# Altium PCB 175-00035 rev2, Flex Pwr Sply.PcbDoc
Units mil, origin at the board's own origin, x right, y up, seen from the top; angles counter-clockwise.
Board outline 6377.95 x 3937.01 mil, 5 copper layers (Top Layer (*GTL), Internal Plane 1 (*GP1), Internal Plane 2 (*GP2), Internal Plane 3 (*.GP3), Bottom Layer (*GBL)); 77 components, 29 nets, 339 pads, 48 vias.
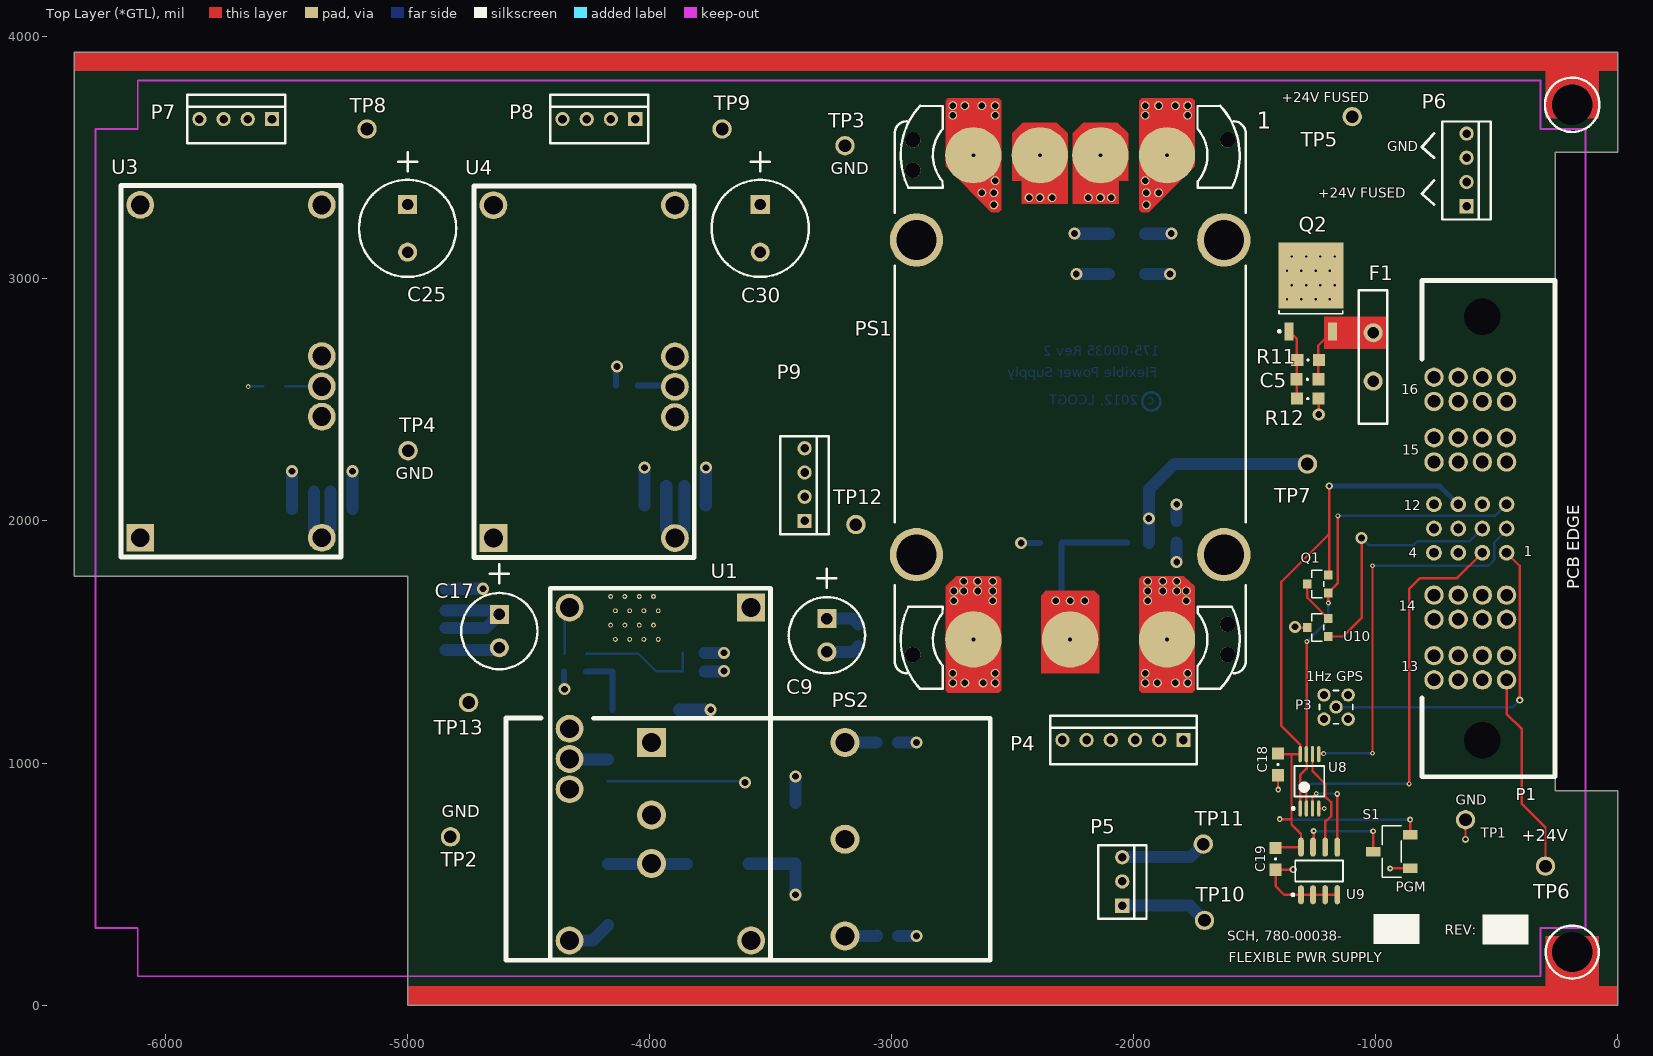
[diagram p0: Top Layer (*GTL) view]
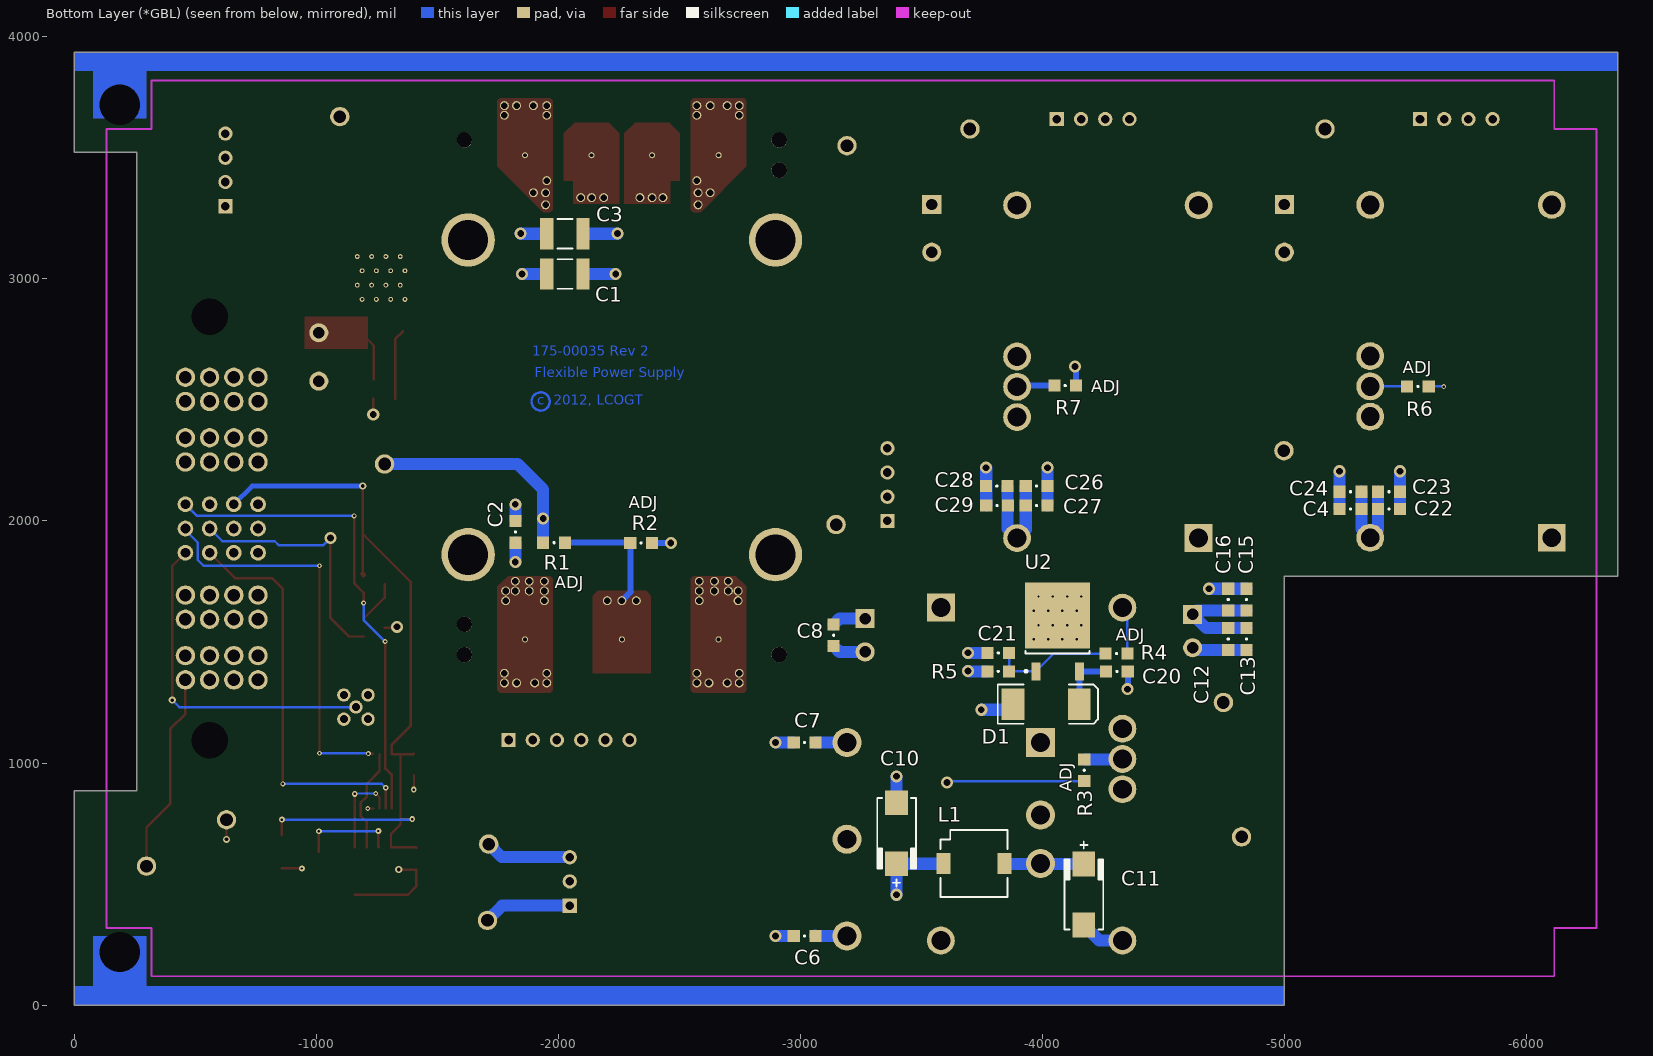
[diagram p1: Bottom Layer (*GBL) view, seen from below]
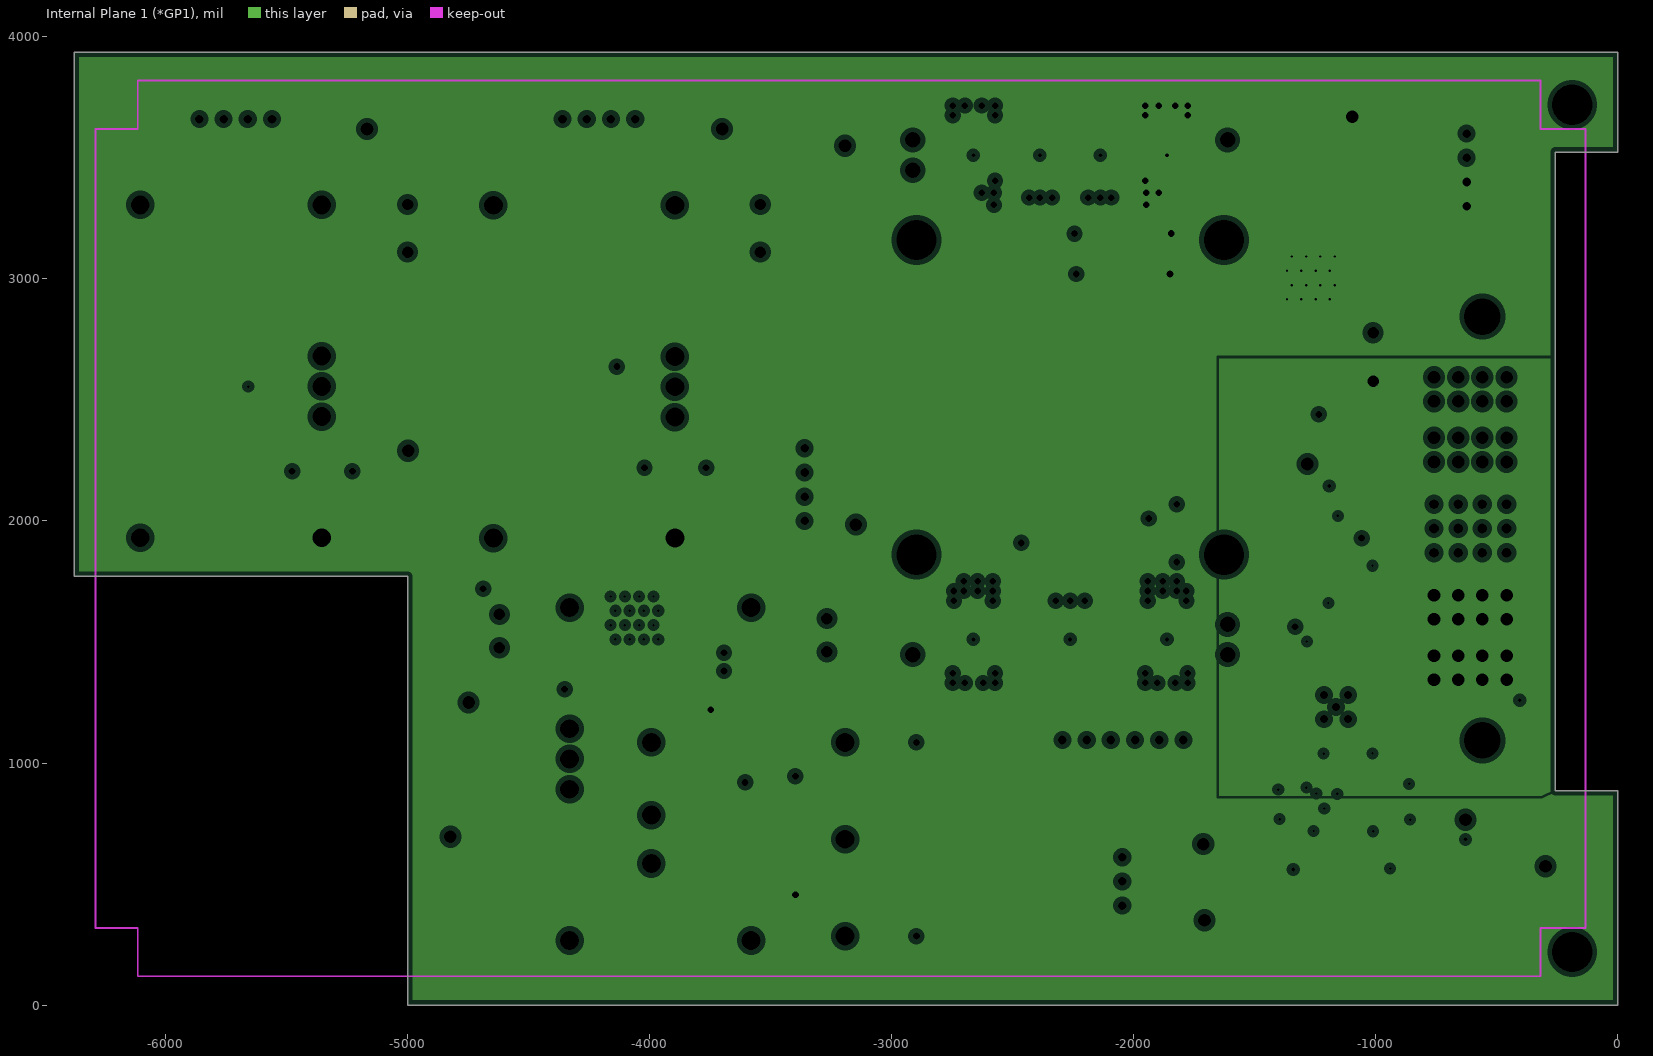
[diagram p2: Internal Plane 1 (*GP1), clearances drawn from the general rule]
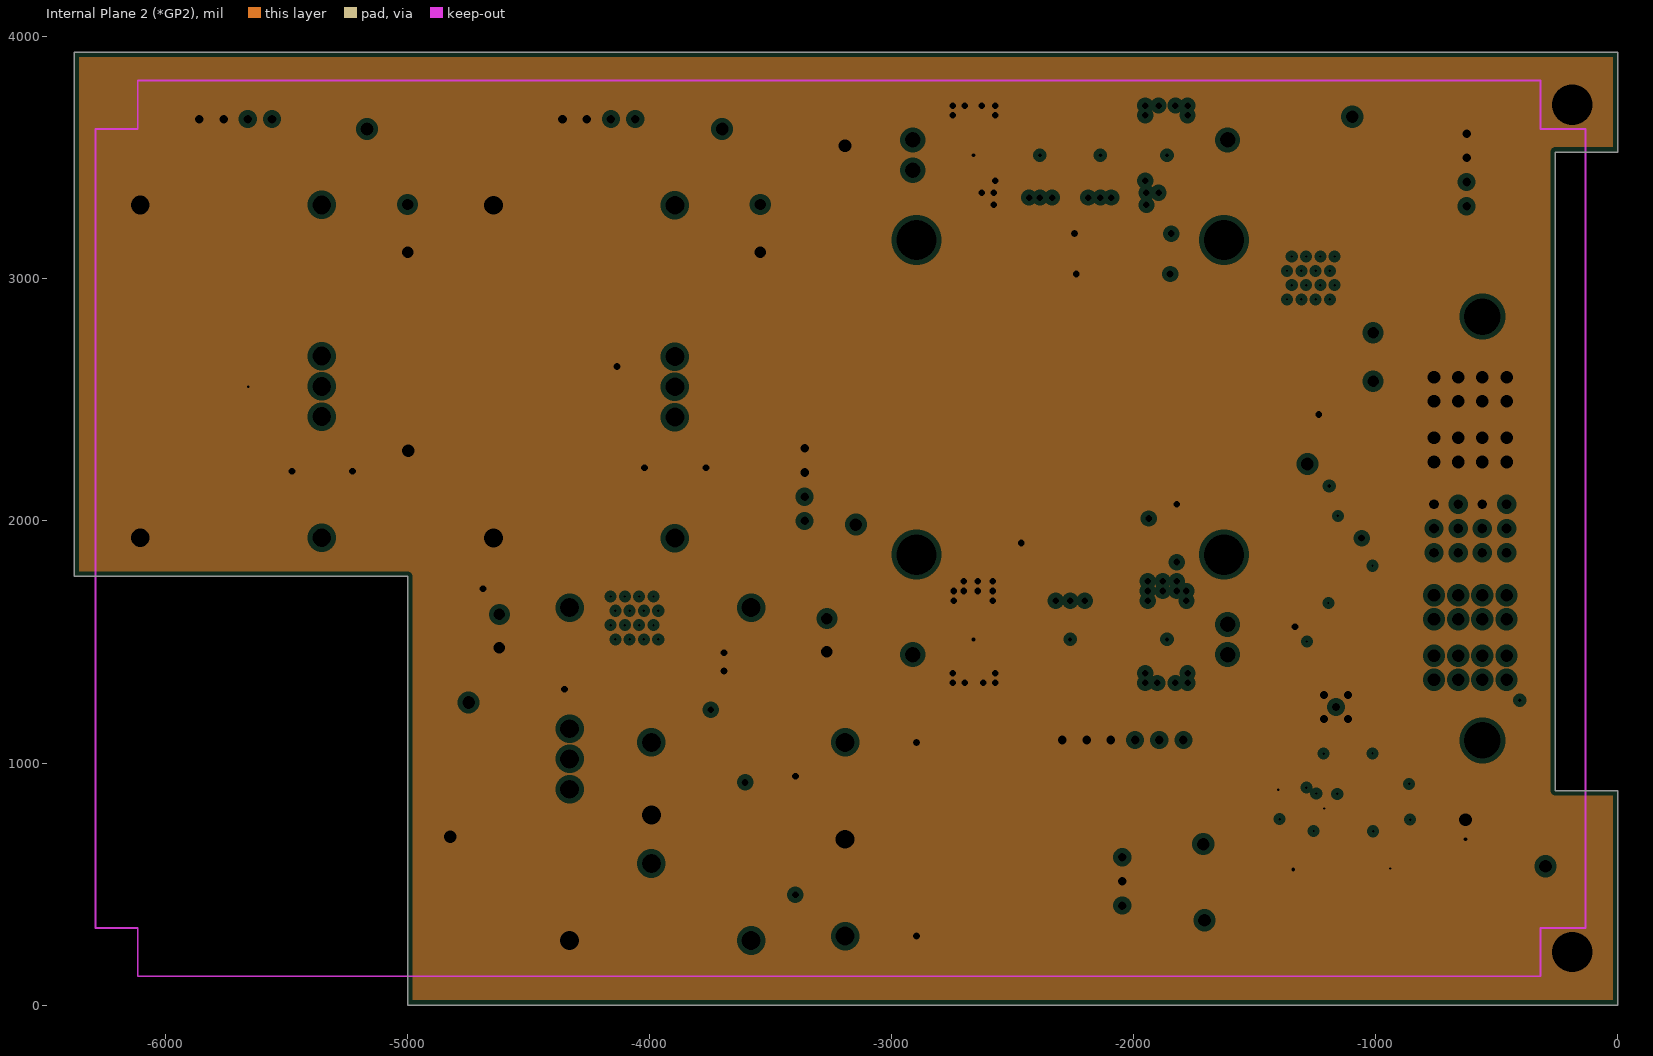
[diagram p3: Internal Plane 2 (*GP2), clearances drawn from the general rule]
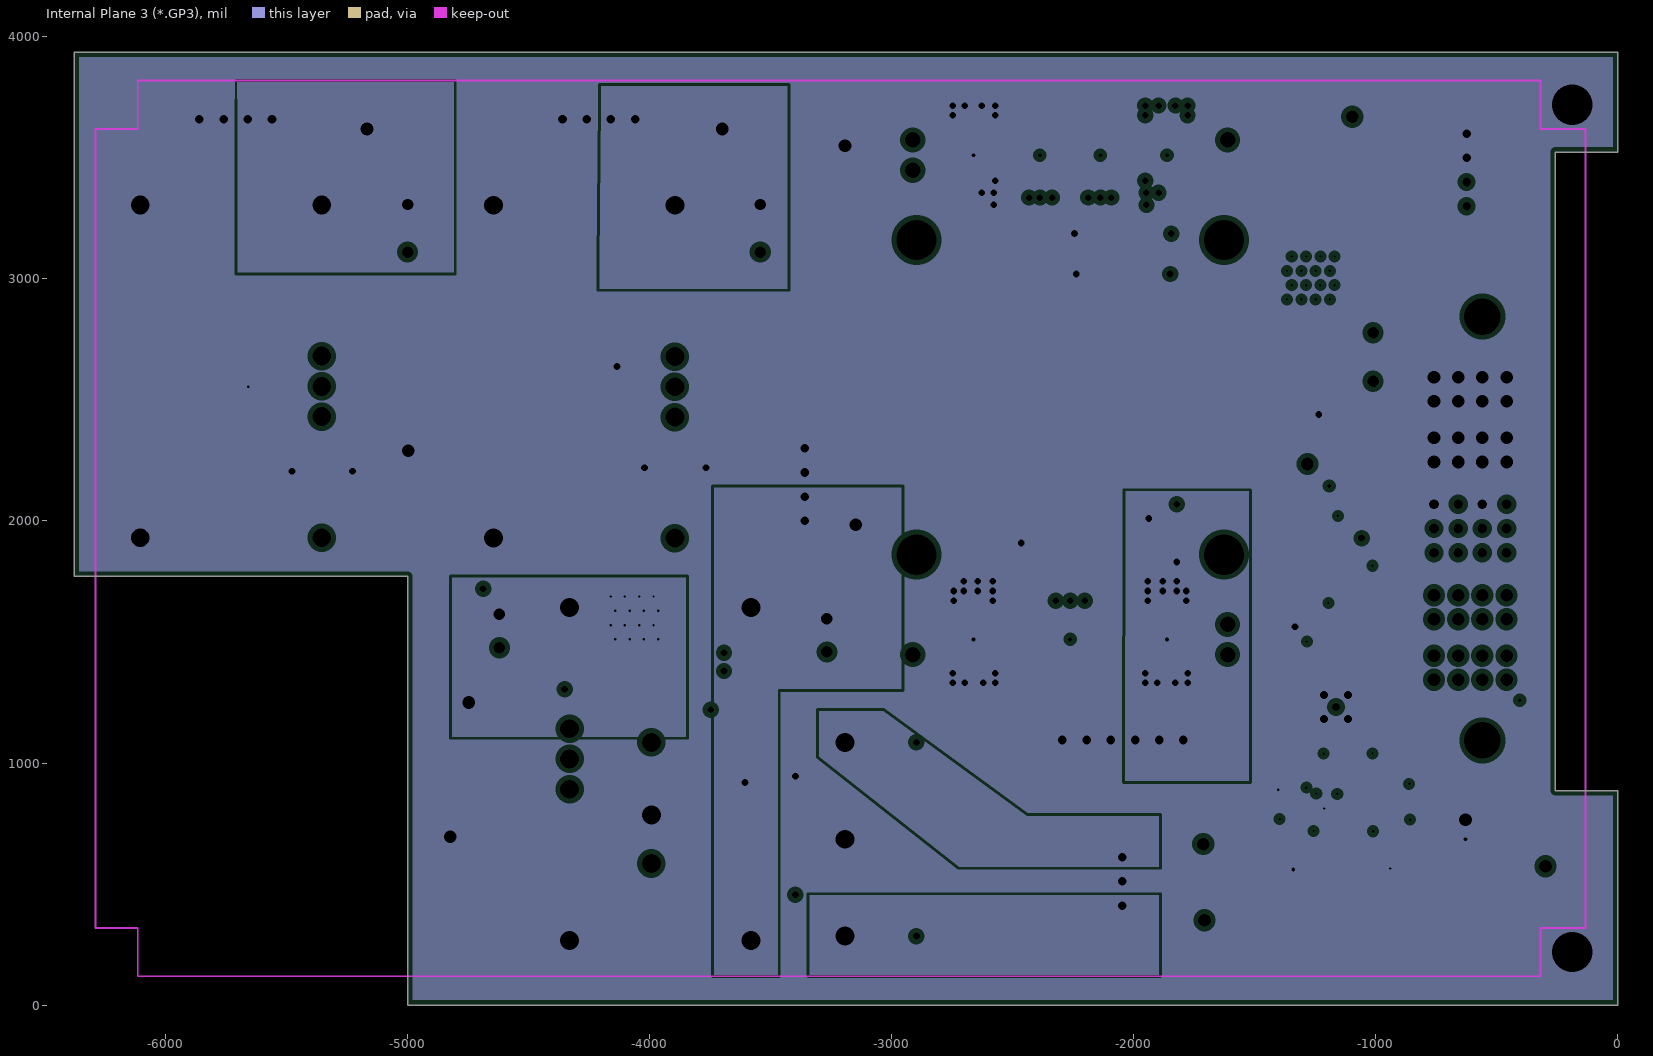
[diagram p4: Internal Plane 3 (*.GP3), clearances drawn from the general rule]

## Layer stack, top to bottom
Top Layer (*GTL): signal copper 1.4
Dielectric: core 12.6, FR-4, Dk 4.8
Internal Plane 1 (*GP1): plane copper 1.4, net (Multiple Nets)
Dielectric: prepreg 12.6, FR-4, Dk 4.8
Internal Plane 2 (*GP2): plane copper 1.4, net GND
Dielectric: core 12.6, FR-4, Dk 4.8
Internal Plane 3 (*.GP3): plane copper 1.4, net (Multiple Nets)
Dielectric: prepreg 12.6, FR-4, Dk 4.8
Bottom Layer (*GBL): signal copper 1.4

## Board outline
-5000,0 -5000,1771.65 -6377.95,1771.65 -6377.95,3937.01 0,3937.01 0,3523.62 -259.84,3523.62 -259.84,885.83 0,885.83 0,0

## Design rules (kind name [scope] priority, off if disabled: settings)
Clearance [All] p1: gap=9
ComponentClearance ComponentClearance_1 [InComponent('PS2') vs InComponent('U1')] p1: gap=-3937.01 collisioncheckmode=3 verticalgap=-3937.01 showdistances=FALSE
ComponentClearance [All] p2: gap=10 collisioncheckmode=3 verticalgap=10 showdistances=FALSE
HoleSize [All] p1: absolutevalues=TRUE maxlimit=200 minlimit=1 maxpercent=80.000 minpercent=20.000
HoleToHoleClearance [All] p1: gap=5 allowstackedmicrovias=TRUE
MinimumSolderMaskSliver [All] p1: minsoldermaskwidth=1
PlaneClearance [All] p1: clearance=20
PlaneConnect PlaneConnect_1 [InComponent('PS1')] p1: planeconnectstyle=Direct reliefexpansion=20 reliefentries=4 reliefconductorwidth=10 reliefairgap=10
PlaneConnect [All] p2: planeconnectstyle=Relief reliefexpansion=20 reliefentries=4 reliefconductorwidth=10 reliefairgap=10
PolygonConnect [All] p1: connectstyle=Relief reliefconductorwidth=10 reliefentries=4 polygonreliefangle="90 Angle"
RoomDefinition "780-00038 rev2, Pg1, SCH, Flex Pwr Sply" [InComponentClass('780-00038 rev2, Pg1, SCH, Flex Pwr Sply')] p1: confinementstyle=ConfineIn formatcopy=TRUE lockcomponents=FALSE outline -7755.91,-1515.34 1173.05,-1515.34 1173.05,5051 -7755.91,5051
RoutingVias [All] p1: holewidth=28 width=50 viastyle="Through Hole" minholewidth=10 minwidth=20 maxholewidth=28 maxwidth=50
SilkToSilkClearance [All] p1: silktosilkclearance=2
SilkscreenOverComponentPads [All] p1: minsilkscreentomaskgap=2
SolderMaskExpansion [All] p1: expansion=4
Width [All] p1: maxlimit=50 minlimit=10 preferedwidth=25
20 further rules are at their usual default settings.

## Components (designator, comment, footprint, x,y, rotation, side; value= is the part's Value field where it differs from the comment)
C1 "Y-RATED" 1812 -2027.64,3020 r0 bottom
C2 "100V" SMD_0805 -1822.95,1955 r90 bottom
C3 "0.22uF" 1812 -2027.64,3186.18 r0 bottom
C4 "35V CER" SMD_0805 -5272.95,2050 r180 bottom
C5 "Cap SMD" SMD_0805 -1282.95,2585 r0 top
C6 "Cap SMD" SMD_0805 -3017.95,285 r180 bottom
C7 "Cap SMD" SMD_0805 -3017.95,1085 r0 bottom
C8 "35V CER" SMD_0805 -3137.95,1527.67 r90 bottom
C9 "35V" "CAP, Thru Hole 8mm dia" -3267.72,1527.67 r90 top
C10 "35V" SMD_CAP_7343 -3397.95,710 r270 bottom
C11 "35V" SMD_CAP_7343 -4171.54,456.5 r90 bottom
C12 "35V CER" SMD_0805 -4767.95,1512.5 r90 bottom
C13 "35V CER" SMD_0805 -4842.95,1512.09 r90 bottom
C15 "35V CER" SMD_0805 -4842.95,1675 r270 bottom
C16 "35V CER" SMD_0805 -4767.95,1675 r270 bottom
C17 "35V" "CAP, Thru Hole 8mm dia" -4620.67,1545 r90 top
C18 "Cap SMD" SMD_0805 -1404.61,994.22 r270 top
C19 "Cap SMD" SMD_0805 -1414.61,604.22 r270 top
C20 "Cap SMD" SMD_0805 -4307.95,1378.74 r0 bottom
C21 "Cap SMD" SMD_0805 -3817.95,1455 r180 bottom
C22 "35V CER" SMD_0805 -5431.91,2050 r0 bottom
C23 "35V CER" SMD_0805 -5431.91,2120.5 r0 bottom
C24 "35V CER" SMD_0805 -5272.95,2120.5 r180 bottom
C25 "35V" "CAP, Thru Hole 10mm dia" -5000,3208.66 r90 top
C26 "35V CER" SMD_0805 -3976.38,2144 r0 bottom
C27 "35V CER" SMD_0805 -3976.38,2063 r0 bottom
C28 "35V CER" SMD_0805 -3811.85,2144 r180 bottom
C29 "35V CER" SMD_0805 -3813.27,2063 r180 bottom
C30 "35V" "CAP, Thru Hole 10mm dia" -3543.31,3208.66 r90 top
D1 "S5BC-13-F" SMC -4015.75,1243 r180 bottom
Designator60 "Comment" "TARGET MECHANICAL 5" 255.91,4409.45 r180 bottom
Designator61 "Comment" "TARGET MECHANICAL 5" -6889.76,-1496.06 r180 bottom
Designator62 "Comment" "TARGET MECHANICAL 5" -6732.28,4330.71 r180 bottom
F1 "RUEF400" "PolySwitch Radial 0.2" -1011.38,2677.17 r90 top
L1 "445-3869-1-ND" "Inductor TDC SLF" -3717.95,585 r90 bottom
P1 "PETC-02-12-02--01-S-RA-SD" PETC-02-12-02-01-RA -610.24,1968.5 r0 top locked
P3 "COAX MMCX" MMCX2.54-V5 -1164.57,1231.1 r90 top
P4 "Header 6" "HDR1X6 for IDC" -1795,1095 r180 top
P5 "Header 3" "HDR1X3 for IDC" -2047.72,410.92 r90 top
P6 "Header 4" "HDR1X4 for IDC" -625.53,3300 r90 top
P7 "Header 4" "HDR1X4 for IDC" -5560,3660 r180 top
P8 "Header 4" "HDR1X4 for IDC" -4060,3660 r180 top
P9 "Header 4" "HDR1X4 for IDC" -3360,2000 r90 top
PS1 "Vicor Micro" "VICOR MICRO SURFMATE" -1612.95,1447.57 r0 top locked
PS2 "BetaDyne LMB15" "BetaDyne LNB15, DC/DC" -2592.95,1185 r180 top
Q1 "FDV304P" SMD_SOT23_3 -1240.16,1739.57 r90 top
Q2 "IRF5303P" "TO-252(D-PAK)  POWERPAD" -1268.74,2954.37 r90 top
R1 "Res 0805" SMD_0805 -1982.95,1910 r0 bottom
R2 "Res 0805" SMD_0805 -2342.95,1909 r180 bottom
R3 "Res 0805" SMD_0805 -4172.95,970 r270 bottom
R4 "Res 0805" SMD_0805 -4306.54,1451.57 r180 bottom
R5 "Res 0805" SMD_0805 -3817.95,1378.74 r180 bottom
R6 "Res 0805" SMD_0805 -5551.18,2555.61 r0 bottom
R7 "Res 0805" SMD_0805 -4094.49,2559.06 r0 bottom
R11 "Res 0805" SMD_0805 -1280,2665 r0 top
R12 "Res 0805" SMD_0805 -1281.54,2505 r180 top
S1 "CJS-1200TB" CAS-120B -934.61,634.22 r90 top
TP1 "Test point" PAD_80D_052H -629.92,765.45 r180 top
TP2 "Test point" PAD_80D_052H -4822.95,695 r90 top
TP3 "Test point" PAD_80D_052H -3192.95,3550 r90 top
TP4 "Test point" PAD_80D_052H -4997.95,2290 r90 top
TP5 "Test point" PAD_80D_052H -1097.95,3670 r90 top
TP6 "Test point" PAD_80D_052H -299.61,574.02 r90 top
TP7 "Test point" PAD_80D_052H -1282.95,2235 r90 top
TP8 "Test point" PAD_80D_052H -5167.48,3619 r90 top
TP9 "Test point" PAD_80D_052H -3700.79,3619 r90 top
TP10 "Test point" PAD_80D_052H -1707.95,350 r90 top
TP11 "Test point" PAD_80D_052H -1712.95,665 r90 top
TP12 "Test point" PAD_80D_052H -3147.95,1985 r90 top
TP13 "Test point" PAD_80D_052H -4747.95,1250 r90 top
U1 "4A Neg Adj Switching Regulator" "TEXAS INST SWITCHING REGULATOR" -4330.71,1641.73 r270 top
U2 "Voltage Reg, Adj" "TO-252(D-PAK)  POWERPAD" -4062.95,1550 r90 bottom
U3 "6A Pos Switching Regulator" "TEXAS INST SWITCHING REGULATOR" -5354.33,1930.61 r90 top
U4 "6A Pos Switching Regulator" "TEXAS INST SWITCHING REGULATOR" -3895.67,1929 r90 top
U8 "SN74CBT3306PWLE" PW008_N -1274.61,924.22 r90 top
U9 "M24C32RMN1" SOP8_N -1234.61,554.22 r90 top
U10 "DS2411" SMD_SOT23_3 -1240.16,1559.57 r90 top

## Footprints (in the part's own frame and the unit in brackets; to place one, negate y for a bottom-side part, rotate by r counter-clockwise, add the part's x,y. Pads: shape width x height; smd on the part's side, far side on the other; paste and mask are expansions set on the pad)
1812 [mm] "Chip Capacitor, Body 4.5x3.2mm, IPC High Density"
  rect 1.4x3.3 smd: 1(-1.9,0) 2(1.9,0)
  silkscreen extent -0.8,-1.55 0.8,1.55, body extent -2.4,-1.7 2.4,1.7, height 1.4
"BetaDyne LNB15, DC/DC" [mil] "15W Low Noise"
  rect 120x120 hole 78: 1(1400,100)
  round 120 hole 78: 2(1400,400) 3(1400,600) 4(600,900) 5(600,500) 6(600,100)
  silkscreen extent 0,0 2000,1000
"CAP, Thru Hole 8mm dia" [mm]
  rect 2x2 hole 1.2: 1(1.75,0)
  round 2 hole 1.2: 2(-1.75,0)
  silkscreen extent -4,-4 7,4
"CAP, Thru Hole 10mm dia" [mm]
  rect 2x2 hole 1.2: 1(2.5,0)
  round 2 hole 1.2: 2(-2.5,0)
  silkscreen extent -5.1,-5.1 8,5.1
CAS-120B [mm] "Copal Electronics CAS SMD Slide Switch"
  rect 1x1.5 smd: 1(-1.75,-1.95) 2(0,1.95) 3(1.75,-1.95)
  silkscreen extent -2.69,-1 2.69,1
"HDR1X3 for IDC" [mm] "Connector; Header; 3 Position"
  rect 1.5x1.5 hole 0.9: 1(0,0)
  round 1.5 hole 0.9: 2(2.54,0) 3(5.08,0)
  silkscreen extent -1.4,-2.54 6.35,2.54
"HDR1X4 for IDC" [mm] "Connector; Header; 4 Position"
  rect 1.5x1.5 hole 0.9: 1(0,0)
  round 1.5 hole 0.9: 2(2.54,0) 3(5.08,0) 4(7.62,0)
  silkscreen extent -1.4,-2.54 8.89,2.54
"HDR1X6 for IDC" [mm] "Connector; Header; 6 Position"
  rect 1.5x1.5 hole 0.9: 1(0,0)
  round 1.5 hole 0.9: 2(2.54,0) 3(5.08,0) 4(7.62,0) 5(10.16,0) 6(12.7,0)
  silkscreen extent -1.4,-2.54 13.97,2.54
"Inductor TDC SLF" [mm] "SLF series"
  rect 2.2x1.5 smd: 1(0,3.2) 2(0,-3.2)
  silkscreen extent -3.5,-3.5 3.5,3.5
MMCX2.54-V5 [mm] "Connector; RF Coaxial, MMCX, Thru-Hole; 5 Position; Vertical"
  round 1.4 hole 0.85: 1(0,0) 2(-1.27,-1.27) 3(1.27,-1.27) 4(1.27,1.27) 5(-1.27,1.27)
  silkscreen extent -1.75,-1.75 1.75,1.75
PAD_80D_052H [mil]
  round 80 hole 52: 1(0,0)
PETC-02-12-02-01-RA [mil] "Samtec Male Pins, PWR(4), Signal(12), Right Angle"
  round 59.06 hole 150 unplated: 0(50,-875) 0(50,875)
  round 65 hole 40: 1(150,-100) 2(50,-100) 3(-50,-100) 4(-150,-100) 5(150,0) 6(50,0) 7(-50,0) 8(-150,0) 9(150,100) 10(50,100) 11(-50,100) 12(-150,100)
  round 80 hole 52: 13(-150,-625) 13(-150,-525) 13(-50,-625) 13(-50,-525) 13(50,-625) 13(50,-525) 13(150,-625) 13(150,-525) 14(-150,-375) 14(-150,-275) 14(-50,-375) 14(-50,-275) 14(50,-375) 14(50,-275) 14(150,-375) 14(150,-275) 15(-150,275) 15(-150,375) 15(-50,275) 15(-50,375) 15(50,275) 15(50,375) 15(150,275) 15(150,375) 16(-150,525) 16(-150,625) 16(-50,525) 16(-50,625) 16(50,525) 16(50,625) 16(150,525) 16(150,625)
  silkscreen extent -200,-1025 350,1025
"PolySwitch Radial 0.2" [mm] "PolySwitch footprint"
  round 2 hole 1.2: 1(-2.54,0) 2(2.54,0)
  silkscreen extent -7,-1.5 7,1.5
PW008_N [mm] "SOP, 8-Leads, Body 3x4.4mm, Pitch 0.65mm, IPC Medium Density"
  oval 1.7x0.35 smd: 1(-2.85,0.975) 2(-2.85,0.325) 3(-2.85,-0.325) 4(-2.85,-0.975) 5(2.85,-0.975) 6(2.85,-0.325) 7(2.85,0.325) 8(2.85,0.975)
  silkscreen extent -2.97,-1.55 1.6,1.82, body extent -2.25,-1.55 2.25,1.55, height 3.1
SMC [mm] "DO-214-AB/SMC; 2 C-Bend Leads; Body 7.9 x 5.9 mm, inc. leads (LxW)"
  rect 2.4x3.3 smd: 1(-3.475,0) 2(3.475,0)
  silkscreen extent -5.07,-2.05 5.43,2.05
SMD_0805 [mil]
  rect 50x50 smd: 1(-45,0) 2(45,0)
  silkscreen extent -1,-1 1,1
SMD_CAP_7343 [mil]
  rect 102x94 smd: NEG(-126,0) POS(126,0)
  silkscreen extent -145,-80 220,80
SMD_SOT23_3 [mil]
  rect 36x36 smd: 1(-37,-43) 2(37,-43) 3(0,43)
  silkscreen extent -57,-25 57,25
SOP8_N [mm] "SOIC, 8-Leads, Body 4.9x3.9mm, Pitch 1.27mm, IPC Medium Density"
  oval 2x0.6 smd: 1(-2.5,1.905) 2(-2.5,0.635) 3(-2.5,-0.635) 4(-2.5,-1.905) 5(2.5,-1.905) 6(2.5,-0.635) 7(2.5,0.635) 8(2.5,1.905)
  silkscreen extent -2.62,-2.5 1.1,2.88, body extent -2,-2.5 2,2.5, height 1.75
"TARGET MECHANICAL 5" [mil]
"TEXAS INST SWITCHING REGULATOR" [mil] "Texas Instruments Integrated switching regulator"
  rect 115x115 hole 78: 1(0,750)
  round 115 hole 78: 2(0,0) 3(500,0) 4(625,0) 5(750,0) 6(1375,0) 7(1375,750)
  silkscreen extent -80,-80 1455,830
"TO-252(D-PAK)  POWERPAD" [mil] "D-PAK, 3-Pads, Body 6.2x6.7mm (max), IPC Medium Density"
  rect 74.8x37.4 smd: 1(-171.26,89.76) 3(-171.26,-89.76)
  round 20 hole 10: 2(-39.37,98.43) 2(-39.37,-19.68) 2(-39.37,39.37) 2(-39.37,-78.74) 2(19.68,78.74) 2(19.68,19.69) 2(19.68,-39.37) 2(19.68,-98.43) 2(78.74,-78.74) 2(78.74,-19.68) 2(78.74,39.37) 2(78.74,98.43) 2(137.8,-98.43) 2(137.8,-39.37) 2(137.8,19.69) 2(137.8,78.74)
  rect 271.65x267.72 smd: 2(59.06,0)
  silkscreen extent -176,-132 -88,135, body extent -98,-132 146,132, height 94
"VICOR MICRO SURFMATE" [mil] "Vicor Microbrick with SurfMate sockets"
  round 64 hole 64 unplated: 0(-1300,0) 0(-1300,2001) 0(-1300,2126) 0(0,0) 0(0,125) 0(0,2126)
  round 220.47 hole 166.14: 0(-1285,413) 0(-1285,1713) 0(-15,413) 0(-15,1713)
  round 37 hole 27 mask+0: 1(-340,1958) 1(-340,2228) 1(-340,2268) 1(-335,1858) 1(-335,1908) 1(-285,1908) 1(-285,2268) 1(-215,2268) 2(-575,1888) 2(-525,1888) 2(-480,1888) 3(-820,1888) 3(-775,1888) 3(-725,1888) 4(-1085,2268) 4(-1015,1908) 4(-1015,2268) 4(-965,1858) 4(-965,1908) 4(-960,1958) 4(-960,2228) 4(-960,2268) 5(-1135,-117) 5(-1135,-77) 5(-1130,223) 5(-1130,263) 5(-1090,263) 5(-1090,303) 5(-1085,-117) 5(-1032.5,263) 5(-1032.5,303) 5(-1010,-117) 5(-970,223) 5(-970,263) 5(-970,303) 5(-960,-117) 5(-960,-77) 6(-710,223) 6(-650,223) 6(-590,223) 7(-340,-117) 7(-340,-77) 7(-330,223) 7(-330,263) 7(-330,303) 7(-290,-117) 7(-267.5,263) 7(-267.5,303) 7(-215,-117) 7(-210,263) 7(-210,303) 7(-170,223) 7(-170,263) 7(-165,-117) 7(-165,-77)
  round 233 / inner round 25 / far side round 25 hole 16 unplated: 1(-250,2063) 2(-525,2063) 3(-775,2063) 4(-1050,2063) 5(-1050,63) 6(-650,63) 7(-250,63)
  round 37 hole 27 paste+0 mask+0: 1(-165,2228) 1(-165,2268) 4(-1135,2228) 4(-1135,2268)
  Top Layer (*GTL) region: -145,-157 -135,-147 -135,283 -180,323 -355,323 -365,313 -365,-147 -355,-157
  Top Layer (*GTL) region: -770,-77 -770,243 -750,263 -550,263 -530,243 -530,-77
  Top Layer (*GTL) region: -1155,-157 -1165,-147 -1165,283 -1120,323 -945,323 -935,313 -935,-147 -945,-157
  Top Layer (*GTL) region: -325,1828 -135,2018 -135,2288 -145,2298 -355,2298 -365,2288 -365,1838 -355,1828
  Top Layer (*GTL) region: -640,1863 -640,2153 -595,2198 -455,2198 -410,2153 -410,1958 -450,1958 -450,1863
  Top Layer (*GTL) region: -660,1863 -660,2153 -705,2198 -845,2198 -890,2153 -890,1958 -850,1958 -850,1863
  Top Layer (*GTL) region: -975,1828 -1165,2018 -1165,2288 -1155,2298 -945,2298 -935,2288 -935,1838 -945,1828
  silkscreen extent -1375,-142 75,2268

## Part data
C1 C3: library part "CAP NP_DOUG"
C2 C4 C8 C12 C13 C15 C16 C22 C23 C24 C26 C27 C28 C29: library part "Cap SMD", "Capacitor"
C5 C6 C7 C18 C19 C20 C21: "Capacitor"
C9 C17: library part "Cap Elec, 100 uF, 35V", "Radial Thru hole"
C10 C11: library part "Cap Tant 35V", "outline 6.0mm x 3.2mm"
C25 C30: library part "Cap Elec, 330 uF, 35V", "Radial Thru hole"
D1: library part Diode, "Default Diode"
F1: library part "Fuse Thermal", "PolySwitch RUE Series"
L1: library part "Inductor SMD 10uH 1.8A", "Inductor"
P1: "SAMTEC, SIGNAL(12)+PWR(4)"
P3: library part COAX-M, "RF Coaxial PCB Connector, MMCX; Thru-Hole, Vertical Mount Plug,  50 Ohm Impedance"
P4: "Header, 6-Pin"
P5: library part "Header 3, MTA100", "Header, 4-Pin"
P6 P7 P8 P9: "Header, 4-Pin"
PS2: "DC/DC LMB15 15W, Dual Output"
Q1: "P-MOSFET LOGIC LEVEL"
Q2: "P-Chan MOSFET"
R1 R2 R3 R4 R5 R6 R7 R11 R12: library part "Res SMD", "Resistor 0805"
S1: library part SW_SPDT_DOUG
TP1 TP2 TP3 TP4 TP5 TP6 TP7 TP8 TP9 TP10 TP11 TP12 TP13: "Test Point"
U1: library part PTN78020A, "Neg Adj Switching Regulator"
U2: library part "Voltage Reg, Adjustable", "IFX27001"
U3 U4: library part PTN78020W, "Pos Adj Switching Regulator"
U8: "Dual FET Bus Switch"
U9: "32 Kbit Serial I²C Bus EEPROM"
U10: "Silicon Serial Number"

## Free pads (board coordinates)
  round 157.48 hole 166.14: 2(-189.16,219) 2(-189.16,3719)

## Via types
v1: diameter 50, hole 28, Top Layer (*GTL) to Bottom Layer (*GBL), 26 vias
v2: diameter 20, hole 10, Top Layer (*GTL) to Bottom Layer (*GBL), 10 vias
v3: diameter 24, hole 10, Top Layer (*GTL) to Bottom Layer (*GBL), 8 vias
v4: diameter 30, hole 15, Top Layer (*GTL) to Bottom Layer (*GBL), 4 vias

## Nets (pads, with @x,y where several pads share a name; then routed paths per layer and width w, separated by ;. In a path a pad name is that pad's centre, name@x,y a point inside that pad or via, vN(x,y) a via of type N, cw(c..) or ccw(c..) an arc to the next point about the centre after c; other vN are vias at no path point)
12V/48V: C2.1 P4.1 P4.2 P4.3 PS1.7 R1.2 TP7.1 | length 998.3
  Bottom Layer (*GBL) w50: R1.2 v1(-1937.95,2010) -1937.95,2129.72 -1832.68,2235 TP7.1 ; v1(-1822.95,1830) C2.1
+3.3V_BKPL: C18.1 C19.1 P1.11 Q1.2 S1.3 U8.8 U9.8 | length 3206.2
  Top Layer (*GTL) w10: C19.1 -1411.18,652.65 U9.8 -1309.61,707.22 -1348.61,746.22 -1348.61,768.22 ; C18.1 -1401.81,1036.43 -1348.61,1036.43 ; v3(-1397.61,768.22) -1348.61,768.22 ; Q1.2@-1192.25,1781.47 -1192.25,1941 ; v4(-1192.25,2144) -1192.25,1941 ; v3(-858.61,766.22) -857.83,765.45 S1.3 ; -1348.61,768.22 -1348.61,1036.43 ; -1348.61,1036.43 U8.8 -1312.99,1075.74 -1390.25,1153 -1390.25,1749 -1198.25,1941 -1192.25,1941
  Top Layer (*GTL) w20: Q1.2 Q1.2@-1192.25,1781.47
  Bottom Layer (*GBL) w10: v3(-1397.61,768.22) -1395.61,766.22 v3(-858.61,766.22)
  Bottom Layer (*GBL) w20: v4(-1192.25,2144) -735.73,2144 P1.11
+5V: C30.1 P8.1 P8.2 TP9.1 U4.6
+7.5/+9V: C25.1 P7.1 P7.2 TP8.1 U3.6
+15V: C6.2 P5.1 PS2.4 TP10.1 | length 497
  Bottom Layer (*GBL) w50: PS2.4 C6.2 C6.2@-3061.54,286.41 ; P5.1 -1768.87,410.92 TP10.1
+20V: C12.2 C13.2 C15.2 C16.2 C17.1 R4.2 TP13.1 U1.2 U2.2 | length 673.6
  Bottom Layer (*GBL) w10: R4.2 -4351.54,1620.9 U1.2
  Bottom Layer (*GBL) w50: C13.2 -4677.48,1557.09 C17.1 -4636.77,1630 C16.2 C15.2
+24V: F1.1 P1.13 P1.14 TP6.1 | length 796.7
  Top Layer (*GTL) w10: P1.13@-460.24,1304.13 -460.24,1202.98 -397.25,1140 -397.25,831 -299.61,733.35 TP6.1
+24V_FUSED: C1.2 C3.2 C4.2 C10.POS C22.2 C23.2 C24.2 C26.2 C27.2 C28.2 C29.2 D1.1 L1.1 P6.1 P6.2 PS1.1 Q2.2 TP5.1 U3.2 U4.2 | length 1532.9
  Bottom Layer (*GBL) w50: C23.2 C22.2 -5386.91,1963.19 U3.2 -5317.95,1966.98 C4.2 C24.2 ; C26.2 C27.2 -3931.38,1964.71 U4.2 -3856.85,1967.82 C28.2 ; D1.1@-3879.57,1220 v1(-3747.95,1220) ; L1.1@-3590.97,584 C10.POS v1(-3397.95,455.8) ; C1.2 v1(-1850.14,3020) ; C3.2 -1846.14,3186.18 v1(-1845.14,3187.18)
-9V: C8.2 C9.1 P9.1 P9.2 R3.2 TP12.1 U1.1 U1.7 | length 709
  Bottom Layer (*GBL) w10: R3.2 -3610.69,925 v1(-3605.71,920.01)
  Bottom Layer (*GBL) w50: C9.1 -3161.85,1596.57 C8.2
-15V: C7.1 P5.3 PS2.6 TP11.1 | length 487.2
  Bottom Layer (*GBL) w50: PS2.6 C7.1 ; P5.3 -1767.03,610.92 TP11.1
GND: C1.1 C2.2 C3.1 C4.1 C6.1 C7.2 C8.1 C9.2 C10.NEG C11.NEG C12.1 C13.1 C15.1 C16.1 C17.2 C18.2 C19.2 C20.1 C21.1 C22.1 C23.1 C24.1 C25.2 C26.1 C27.1 C28.1 C29.1 C30.2 P1.10 P1.12 P1.15 P1.16 P3.2 P3.3 P3.4 P3.5 P4.4 P4.5 P4.6 P5.2 P6.3 P6.4 P7.3 P7.4 P8.3 P8.4 P9.3 P9.4 pad.2 PS1.4 PS1.5 PS2.2 PS2.5 R2.2 R5.1 R6.1 R7.1 R12.1 S1.1 TP1.1 TP2.1 TP3.1 TP4.1 U1.6 U3.1 U3.7 U4.1 U4.7 U8.4 U9.1 U9.2 U9.3 U9.4 U10.3 | length 3177.8
  Top Layer (*GTL) w10: C18.2 -1404.61,891.22 v3(-1403.61,890.22) ; v4(-1341.25,560) -1342.03,559.22 C19.2 -1414.61,491.22 -1379.18,455.8 U9.1 U9.2 U9.3 U9.4 ; v1(-1334.16,1562.57) -1331.16,1559.57 U10.3 ; R12.1 -1236.54,2440.32 v1(-1236.22,2440) ; U8.4 v2(-1213.25,812.02) ; v3(-941.61,564.22) -940.5,565.33 S1.1 ; v4(-629.92,684.37) TP1.1
  Bottom Layer (*GBL) w10: v2(-5657.95,2555) -5657.35,2555.61 R6.1 ; v1@-3768.27,2218.59 v1(-3766.85,2220)
  Bottom Layer (*GBL) w25: C20.1 -4352.95,1306.41 v1(-4351.54,1305) ; R7.1 -4139.49,2633.65 v1(-4135.34,2637.8) ; v1(-2465.44,1909) R2.2
  Bottom Layer (*GBL) w50: C22.1 C23.1 v1(-5476.91,2205) ; C4.1 C24.1 v1(-5227.95,2205) ; C13.1 -4629.69,1467.09 C17.2 ; C15.1 C16.1 v1(-4687.95,1720) ; U1.6 -4235.31,266.73 C11.NEG ; C27.1 C26.1 v1(-4021.38,2220) ; R5.1 -3694.21,1378.74 v1(-3692.95,1380) ; C21.1 v1(-3692.95,1455) ; C29.1 v1@-3768.27,2218.59 ; C10.NEG v1(-3397.95,944.88) ; C9.2 -3161.85,1458.77 C8.1 ; PS2.5 PS2.5@-3186.29,678.34 ; C6.1 v1(-2897.95,285) ; C7.2 v1(-2897.95,1085) ; v1(-2245.14,3187.18) -2245.14,3186.18 C3.1 ; v1(-2237.64,3020) C1.1 ; C2.2 v1(-1822.95,2068.5)
GPS_DATA: P1.1 P3.1 | length 1401.7
  Top Layer (*GTL) w10: P1.1 -405.91,1814.17 v4(-405.91,1259.84)
  Bottom Layer (*GBL) w10: P3.1 -434.65,1231.1 v4(-405.91,1259.84)
I2C_SCL: U8.6 U9.6 | length 425.6
  Top Layer (*GTL) w10: U8.6 -1261.81,966.43 -1209.61,914.22 -1209.61,862.35 -1185.25,838 -1185.25,780 -1209.61,755.65 U9.6
I2C_SDA: U8.3 U9.5 | length 375.4
  Top Layer (*GTL) w10: U8.3 -1261.81,858.44 v2(-1246.25,874) ; U9.5 v3(-1159.61,872.22)
  Bottom Layer (*GBL) w10: v2(-1246.25,874) -1161.38,874 v3(-1159.61,872.22)
NetC5_1: C5.1 Q2.1 R11.1 R12.2 | length 291.4
  Top Layer (*GTL) w10: Q2.1 -1326.54,2751.14 R12.2
NetC5_2: C5.2 F1.2 Q2.3 R11.2 | length 222.5
  Top Layer (*GTL) w10: C5.2 -1237.95,2724.13 Q2.3
NetC11_pos: C11.POS L1.2 PS2.3 | length 325.1
  Bottom Layer (*GBL) w50: C11.POS L1.2@-3846.44,582.5
NetC20_2: C20.2 D1.2 U2.3 | length 269.2
  Bottom Layer (*GBL) w25: C20.2 U2.3 -4152.72,1220.47 D1.2@-4153.19,1220
NetC21_2: C21.2 R4.1 R5.2 U2.1 | length 505
  Bottom Layer (*GBL) w10: R4.1 -4046.02,1451.57 U2.1 R5.2 C21.2
NetP1_2: P1.2 U8.2 | length 1686.8
  Top Layer (*GTL) w10: U8.2 v3(-1287.4,898.02) ; v2(-863.16,913.91) -863.16,1719 -818.16,1764 -664.74,1764 P1.2
  Bottom Layer (*GBL) w10: v3(-1287.4,898.02) -1271.52,913.91 v2(-863.16,913.91)
NetP1_5: P1.5 U8.5 | length 1662.2
  Top Layer (*GTL) w10: U8.5@-1233.65,1039 v2(-1216.25,1039) v2@-1218.82,1036.43 ; v2(-1014.25,1040) v2(-1014.25,1815)
  Bottom Layer (*GBL) w10: v2(-1216.25,1039) -1215.25,1040 v2(-1014.25,1040) ; v2(-1014.25,1815) -534.95,1815 -510.95,1839 -510.95,1910.79 -460.24,1961.5 P1.5
NetPS1_6: PS1.6 R1.1 R2.1 | length 523.3
  Bottom Layer (*GBL) w25: PS1.6@-2262.95,1670.57 -2297.95,1705.57 R2.1 -2296.95,1910 R1.1
NetQ1_3: Q1.3 U10.2 | length 178.6
  Top Layer (*GTL) w10: Q1.3 -1283.16,1682.57 U10.2
NetR3_1: R3.1 U1.4 | length 158.5
  Bottom Layer (*GBL) w50: U1.4 -4328.98,1015 R3.1
NetR6_2: R6.2 U3.4 | length 151.9
  Bottom Layer (*GBL) w10: R6.2 U3.4
NetR7_2: R7.2 U4.4 | length 148.8
  Bottom Layer (*GBL) w25: R7.2 U4.4@-3900.72,2559.06
NetS1_2: S1.2 U9.7 | length 397.9
  Top Layer (*GTL) w10: U9.7 -1257.61,654.65 v3(-1257.61,719.22) ; v3(-1011.61,718.22) -1011.38,718 S1.2
  Bottom Layer (*GBL) w10: v3(-1257.61,719.22) -1256.61,718.22 v3(-1011.61,718.22)
SILICON_SN: P1.6 U10.1 | length 1038.9
  Top Layer (*GTL) w10: U10.1 -1135.77,1522.57 -1059.25,1599.09 v1(-1059.25,1929)
  Bottom Layer (*GBL) w10: v1(-1059.25,1929) -1030.25,1900 -845.25,1900 -829.25,1916 -612.74,1916 P1.6
~CS_SLOT: P1.9 Q1.1 U8.1 U8.7 | length 1991.3
  Top Layer (*GTL) w10: U8.1 -1313.4,812.43 -1313.4,949.85 -1286.25,977 -1286.25,1501 v2(-1285.25,1502) ; v2(-1196.25,1661) -1196.25,1701.66 Q1.1 -1158.25,1741.47 -1158.25,2020 v2(-1157.25,2021)
  Bottom Layer (*GBL) w10: v2(-1285.25,1502) -1196.25,1591 v2(-1196.25,1661) ; v2(-1157.25,2021) -507.74,2021 P1.9
pads on no net: P1.0 P1.3 P1.4 P1.7 P1.8 PS1.0 PS1.2 PS1.3 PS2.1 U1.3 U1.5 U3.3 U3.5 U4.3 U4.5
copper on no net: | length 236.5
  Bottom Layer (*GBL) w10: -1889.76,2493.5 ccw(c-1927.41,2493.5) -1889.76,2493.5

## Polygon pours and split planes (outlines as drawn)
+24V on Internal Plane 1 (*GP1) (split plane): -279.94,885.83 -279.64,882.75 -316.38,864.49 -1647.49,864.49 -1647.49,2671.11 -279.94,2671.11
+24V_FUSED on Internal Plane 1 (*GP1) (split plane): -20.1,3543.72 -259.84,3543.72 -263.76,3543.33 -267.53,3542.19 -271.01,3540.33 -274.05,3537.83 -276.55,3534.79 -278.41,3531.31 -279.55,3527.54 -279.94,3523.62 -279.94,2683.22 -1653.54,2683.22 -1655.11,2683.01 -1656.57,2682.41 -1657.82,2681.44 -1658.78,2680.19 -1659.39,2678.73 -1659.6,2677.17 -1659.6,858.44 -1659.39,856.87 -1658.78,855.41 -1657.82,854.16 -1656.57,853.2 -1655.11,852.6 -1653.54,852.39 -314.96,852.39 -314.36,852.47 -313.76,852.51 -313.58,852.57 -313.39,852.6 -312.84,852.83 -312.27,853.02 -274.28,871.89 -274.05,871.62 -271.01,869.12 -267.53,867.26 -263.76,866.12 -259.84,865.73 -20.1,865.73 -20.1,20.1 -4979.9,20.1 -4979.9,1771.65 -4980.29,1775.57 -4981.43,1779.34 -4983.29,1782.82 -4985.79,1785.86 -4988.83,1788.36 -4992.31,1790.22 -4996.08,1791.36 -5000,1791.75 -6357.86,1791.75 -6357.86,3916.91 -20.1,3916.91
GND on Internal Plane 2 (*GP2) (split plane): -20.1,3543.72 -259.84,3543.72 -263.76,3543.33 -267.53,3542.19 -271.01,3540.33 -274.05,3537.83 -276.55,3534.79 -278.41,3531.31 -279.55,3527.54 -279.94,3523.62 -279.94,885.83 -279.55,881.91 -278.41,878.14 -276.55,874.66 -274.05,871.62 -271.01,869.12 -267.53,867.26 -263.76,866.12 -259.84,865.73 -20.1,865.73 -20.1,20.1 -4979.9,20.1 -4979.9,1771.65 -4980.29,1775.57 -4981.43,1779.34 -4983.29,1782.82 -4985.79,1785.86 -4988.83,1788.36 -4992.31,1790.22 -4996.08,1791.36 -5000,1791.75 -6357.86,1791.75 -6357.86,3916.91 -20.1,3916.91
12V/48V on Internal Plane 3 (*.GP3) (split plane): -1524,2121.37 -1524,926.05 -2036.89,926.05 -2033.96,2122.83
-15V on Internal Plane 3 (*.GP3) (split plane): -2444.52,782.52 -2444.23,782.36 -2443.97,782.16 -2443.54,781.98 -2443.14,781.76 -2442.82,781.68 -2442.51,781.56 -2442.05,781.5 -2441.6,781.39 -2441.27,781.39 -2440.94,781.35 -1895.82,781.35 -1895.82,571.38 -2721.71,571.38 -3301.03,1026.56 -3301.03,1214.42 -3033.48,1214.42
+15V on Internal Plane 3 (*.GP3) (split plane): -1895.82,124.16 -3340.4,124.16 -3340.4,453.95 -1895.82,453.95
-9V on Internal Plane 3 (*.GP3) (split plane): -2958.81,1305.26 -3464.57,1305.26 -3466.13,1305.06 -3467.59,1304.45 -3468.85,1303.49 -3469.81,1302.24 -3470.41,1300.78 -3470.62,1299.21 -3470.62,124.16 -3734.11,124.16 -3734.11,2137.95 -2958.81,2137.95
+5V on Internal Plane 3 (*.GP3) (split plane): -3431.25,2958.81 -4206.55,2958.81 -4206.55,3070.85 -4201.9,3719.96 -4201.9,3719.98 -4201.9,3720 -4201.9,3795.98 -3431.25,3795.98
+7.5/+9V on Internal Plane 3 (*.GP3) (split plane): -4809.2,3026.05 -5702.61,3026.05 -5702.61,3740.16 -5702.82,3741.72 -5703.42,3743.18 -5703.56,3743.37 -5703.56,3812.95 -4809.2,3812.95
GND on Internal Plane 3 (*.GP3) (split plane): -20.1,3543.72 -259.84,3543.72 -263.76,3543.33 -267.53,3542.19 -271.01,3540.33 -274.05,3537.83 -276.55,3534.79 -278.41,3531.31 -279.55,3527.54 -279.94,3523.62 -279.94,885.83 -279.55,881.91 -278.41,878.14 -276.55,874.66 -274.05,871.62 -271.01,869.12 -267.53,867.26 -263.76,866.12 -259.84,865.73 -20.1,865.73 -20.1,20.1 -4979.9,20.1 -4979.9,1771.65 -4980.29,1775.57 -4981.43,1779.34 -4983.29,1782.82 -4985.79,1785.86 -4988.83,1788.36 -4992.31,1790.22 -4996.08,1791.36 -5000,1791.75 -6357.86,1791.75 -6357.86,3916.91 -20.1,3916.91
+20V on Internal Plane 3 (*.GP3) (split plane): -3849.99,1108.41 -4816.9,1108.41 -4816.9,1765.6 -3849.99,1765.6

## Keep-outs
Keep-Out Layer:
  lines w8: -6289.57,319 -6289.57,3619 -6114.57,3619 -6114.57,3819 -320.87,3819 -320.87,3619 -133.57,3619 -133.57,319 -319.95,319 -319.95,119 -6114.57,119 -6114.57,319 -6289.57,319

## Other copper
Top Layer (*GTL):
  rectangle net GND: -5000,0 0,78.74
  rectangle net GND: -299.61,78.74 -78.74,285
  rectangle net GND: -6377.95,3858.27 0,3937.01
  rectangle net GND: -299.61,3661.42 -78.74,3858.27
  rectangle net NetC5_2: -1214.57,2710 -952.32,2845
  text "*.GTL - TOP LAYER GERBER DATA" at -4323.7,-1302.01 h80
Bottom Layer (*GBL):
  rectangle net GND: -4997.95,0 0,78.74
  rectangle net GND: -299.61,78.74 -78.74,285
  rectangle net GND: -6377.95,3858.27 0,3937.01
  rectangle net GND: -299.61,3661.42 -78.74,3858.27
  text "175-00035 Rev 2" at -1891.95,2682.26 h40
  text "Flexible Power Supply" at -1902.95,2593.5 h40
  text "c  2012, LCOGT" at -1914.15,2480.32 h40
  text "*.GBL - BOTTOM LAYER GERBER DATA" at -4323.7,-1302.01 h80
Internal Plane 1 (*GP1) (plane layer: these items are gaps in the copper):
  lines w12: -259.84,885.83 -314.96,858.44 -1653.54,858.44 -1653.54,2677.17 -259.84,2677.17
  text "*.GP1 - INTERNAL PLANE LAYER 1 GERBER DATA" at -4323.7,-1302.01 h80
Internal Plane 2 (*GP2) (plane layer: these items are gaps in the copper):
  text "*.GP2 - INTERNAL PLANE LAYER 2 GERBER DATA" at -4323.7,-1302.01 h80
Internal Plane 3 (*.GP3) (plane layer: these items are gaps in the copper):
  lines w10: -5708.66,3740.16 -5708.66,3819
  lines w12: -5708.66,3740.16 -5708.66,3020 -4803.15,3020 -4803.15,3819 -5708.66,3819 ; -4822.95,1102.36 -3843.94,1102.36 -3843.94,1771.65 -4822.95,1771.65 -4822.95,1102.36 ; -4212.6,2952.76 -4212.6,3070.87 -4207.95,3720 -4207.95,3802.03 -3425.2,3802.03 -3425.2,2952.76 -4212.6,2952.76 ; -3740.16,118.11 -3740.16,2144 -2952.76,2144 -2952.76,1299.21 -3450.22,1299.21 -3464.57,1299.21 -3464.57,118.11 -3740.16,118.11 ; -3346.46,118.11 -3346.46,460 -1889.76,460 -1889.76,118.11 -3346.46,118.11 ; -3307.09,1023.62 -2723.8,565.33 -1889.76,565.33 -1889.76,787.4 -2440.94,787.4 -3031.5,1220.47 -3307.09,1220.47 -3307.09,1023.62 ; -2042.95,920 -2039.99,2128.9 -1517.95,2127.4 -1517.95,920 -2042.95,920
  text "*.GP3- INTERNAL PLANE LAYER 3 GERBER DATA" at -4323.7,-1302.01 h80

## Silkscreen, mask and mechanical layers (free items; w line width, h text height)
Top Overlay:
  circle w10: c-189.16,219 r109.45
  circle w10: c-189.16,3719 r112.5
  rectangle: -1010.95,253 -820.95,376.37
  rectangle: -559.95,251 -369.95,374.37
  lines w12: -760,3306.85 -810.24,3350.57 -760,3406.85 ; -760,3500 -810.24,3543.72 -760,3600
  lines w20: -4592.95,823.46 -4592.95,1185.98 -4448.82,1185.98
  text "+24V FUSED" at -1390,3730 h40
  text "GND" at -952.32,3527.54 h40
  text "GND" at -3252.95,3433 h50
  text "+24V FUSED" at -1237.95,3335.57 h40
  text "GND" at -5047.95,2173 h50
  text "1Hz GPS" at -1287.16,1338.58 h40
  text "GND" at -669.29,826.77 h40
  text "GND" at -4857.95,776 h50
  text "+24V" at -397.25,677.53 h50
  text "PGM" at -918.7,467.14 h40
  text "REV:" at -715.95,291 h40
  text "SCH, 780-00038-" at -1613.95,266 h40
  text "FLEXIBLE PWR SUPPLY" at -1607.95,177 h40
  text "*.GTO - TOP OVERLAY GERBER DATA" at -4323.7,-1302.01 h80
Bottom Overlay:
  text "ADJ" at -5487.95,2609 h50
  text "ADJ" at -4201.95,2531 h50
  text "ADJ" at -2290.95,2052 h50
  text "ADJ" at -1984.95,1721 h50
  text "ADJ" at -4302.95,1506 h50
  text "ADJ" at -4121.95,881 h50 r270
  text "*GBO - BOTTOM OVERLAY GERBER DATA" at -4323.7,-1302.01 h80
Top Paste:
  text "*.GTP - TOP-SIDE SOLDER PASTE MASK" at -4323.71,-1302 h80
Bottom Paste:
  text "*.GBP - BOTTOM-SIDE SOLDER PASTE MASK" at -4323.71,-1302 h80
Top Solder:
  rectangle: -4997.95,0 0,78.74
  rectangle: -6377.95,3858.27 0,3937.01
  text "*.GTS - TOP SOLDER MASK GERBER DATA" at -4323.7,-1302.01 h80
Bottom Solder:
  region: -1811.97,2429 -1811.97,2755.91 -2839.97,2755.91 -2839.97,2429
  rectangle: -5000,0 0,78.74
  rectangle: -6377.95,3858.27 0,3937.01
  text "*.GBS - BOTTOM SOLDER MASK GERBER DATA" at -4323.7,-1302.01 h80
Mechanical 1:
  the board outline again, w39.37
Mechanical 2:
  drawing of 234 lines, arcs and shapes, not listed
  text "NOTES (UNLESS OTHERWISE SPECIFIED):" at -17726.95,7031 h90
  text "GENERAL" at -17626.95,6831 h90
  text "1)" at -17526.95,6630.95 h75
  text "PCB IS 5-LAYER, .062\" THICK." at -17326.95,6630.97 h75
  text "2)" at -17526.95,6480.95 h75
  text "CONSTRUCTION IS SOLDER-MASK-OVER-BARE-COPPER (SMOBC)." at -17326.95,6480.95 h75
  text "3)" at -17526.95,6330.95 h75
  text "ACCEPTABILITY SHALL BE BASED ON IPC-A-600, CLASS 2." at -17326.95,6330.95 h75
  text "4)" at -17526.95,6180.95 h75
  text "THE FOLLOWING GERBER RS274X PHOTO TOOL FILES SHALL BE USED TO DEFINE ALL CIRCUIT FEATURES:" at -17326.95,6180.95 h75
  text "*.GTL - TOP LAYER GERBER DATA" at -17052.95,5970 h80
  text "*.GP1 - INTERNAL PLANE LAYER 1 GERBER DATA" at -17052.95,5355.34 h80
  text "*.GP2 - INTERNAL PLANE LAYER 2 GERBER DATA" at -17052.95,5201.67 h80
  text "*.GP3- INTERNAL PLANE LAYER 3 GERBER DATA" at -17052.95,5048 h80
  text "*.GBL - BOTTOM LAYER GERBER DATA" at -17052.95,4587 h80
  text "*.GTO - TOP OVERLAY GERBER DATA" at -17052.95,4433.34 h80
  text "*.GTS - TOP SOLDER MASK GERBER DATA" at -17052.95,4279.67 h80
  text "*.GTP - TOP-SIDE SOLDER PASTE MASK" at -17052.96,4126 h80
  text "*GBO - BOTTOM OVERLAY GERBER DATA" at -17052.95,3972.34 h80
  text "*.GBS - BOTTOM SOLDER MASK GERBER DATA" at -17052.95,3818.67 h80
  text "*.GBP - BOTTOM-SIDE SOLDER PASTE MASK" at -17052.96,3665 h80
  text "5)" at -17623.95,2949.23 h75
  text "THE PHOTO TOOL SHALL NOT BE COMPENSATED WITHOUT PRIOR ENGINEERING APPROVAL." at -17423.95,2949.23 h75
  text "PCB DESIGNER: RICH LOBDILL   PH (805) 880-1621  FAX (805) 961-1792." at -17423.95,2799.28 h75
  text "FABRICATION TOLERANCES" at -17568.95,2473 h90
  text "6)" at -17468.95,2272.95 h75
  text "END PRODUCT CONDUCTOR WIDTHS AND PAD DIAMETERS SHALL NOT VARY MORE THAN" at -17268.95,2272.95 h75
  text "0.002\" FROM THE 1:1 DIMENSIONS OF THE MASTER ARTWORK." at -17268.95,2123 h75
  text "7)" at -17468.95,1972.95 h75
  text "THE CONDUCTIVE PATTERN SHALL BE POSITIONED SO THAT THE LOCATION OF ANY PAD OR" at -17268.95,1972.95 h75
  text "LAND SHALL BE WITHIN 0.005\" DIAMETER TO THE TRUE POSITION OF THE HOLE IT CIRCUMSCRIBES." at -17268.95,1823 h75
  text "8)" at -17468.95,1672.95 h75
  text "ALL DRILL HOLE SIZES AND TOLERANCES APPLY AFTER PLATING." at -17268.95,1672.95 h75
  text "9)" at -17468.95,1522.95 h75
  text "THE MINIMUM ANNULAR RING SHALL BE 0.005\"." at -17268.95,1522.95 h75
  text "10)" at -17523.95,1372.95 h75
  text "BOW AND TWIST SHALL NOT EXCEED 0.010\" PER INCH." at -17268.95,1372.95 h75
  text "11)" at -17513.95,1222.95 h75
  text "FOR PCB ROUTING DIMENSIONS: .XXX = +/-.005\"  .XX = +/-.020\"" at -17268.95,1222.95 h75
  text "MATERIAL" at -17568.95,1023 h90
  text "12)" at -17523.95,822.95 h75
  text "BASE MATERIAL IS FR4 EPOXY FIBERGLASS" at -17261.95,817 h75
  text "SEE STACK-UP LEGEND FOR COPPER CLADDING CALL OUTS" at -17261.95,677 h75
  text "13)" at -17523.95,672.95 h75
  text "PLATING" at -17568.95,473 h90
  text "14)" at -17523.95,277.95 h75
  text "ALL HOLES AND CONDUCTIVE SURFACES SHALL BE PLATED WITH A MINIMUM OF 0.001\" COPPER." at -17268.95,277.95 h75
  text "15)" at -17523.95,127.95 h75
  text "AFTER SOLDERMASK, ALL EXPOSED HOLES AND CONDUCTIVE SURFACES SHALL BE COATED" at -17268.95,127.95 h75
  text "WITH A GOLD IMMERSION PLATING TO PRESERVE SOLDERABILITY." at -17261.95,-23 h75
  text "16)" at -17515.6,-185.01 h75
  text "COPPER THEVING ON LAYERS AS NEEDED" at -17276.6,-187.06 h75
  text "COATINGS" at -17568.95,-438.54 h90
  text "17)" at -17527.6,-633.59 h75
  text "THE SOLDERMASK SHALL BE BLACK LIQUID PHOTO-IMAGEABLE PER IPC-SM-840, TYPE-B, CLASS 2." at -17268.95,-633.59 h75
  text "THE SOLDERMASK REGISTRATION ALLOWANCE IS 0.003\".  THERE SHALL BE NO SOLDERMASK ON" at -17268.95,-783.59 h75
  text "18)" at -17515.6,-807.09 h75
  text "ANY SOLDER PAD OR LAND." at -17268.95,-933.59 h75
  text "MARKING" at -17568.95,-1133.54 h90
  text "PROCESS NOTES" at -6328.8,-1168.73 h90
  text "THE LEGEND SHALL BE SCREEN-PRINTED USING PERMANENT YELLOW EPOXY INK." at -17268.95,-1328.59 h75
  text "19)" at -17523.95,-1338.58 h75
  text "THE SCREEN PRINTING REGISTRATION ALLOWANCE IS 0.007\".  THERE SHALL BE NO INK ON ANY" at -17268.95,-1478.59 h75
  text "20)" at -17535.95,-1496.06 h75
  text "1)" at -6122.05,-1496.06 h75
  text "INSTALL PEM NUTS AS SHOWN" at -5871.32,-1498.27 h75
  text "SOLDER PAD OR LAND." at -17268.95,-1628.54 h75
  text "SOLDER PASTE ON PADS OF PS1 MUST BE 0.010in TO 0.012in THK" at -5885.83,-1751.97 h75
  text "21)" at -17523.95,-1771.65 h75
  text "2)" at -6134.05,-1771.65 h75
  text "THE VENDOR CODE AND UL FLAMMABILITY RATING MAY BE ETCHED IN THE FOIL OR MARKED IN" at -17268.95,-1778.59 h75
  text "PERMANENT EPOXY INK (VENDOR'S OPTION)." at -17268.95,-1928.54 h75
  text "ELECTRICAL TESTING" at -17568.95,-2128.54 h90
  text "22)" at -17504.27,-2322.83 h75
  text "ALL BOARDS SHALL BE ELECTRICALLY TESTED TO THE SUPPLIED IPC-D-356A NET LIST" at -17268.95,-2323.59 h75
  text "Las Cumbres Observatory, Inc." at -1479.47,-2389.29 h90
  text "FOR CONTINUITY, OPENS AND SHORTS." at -17268.95,-2473.54 h75
  text "Las Cumbres Observatory" at -3249.47,-2509.29 h150
  text "6740 Cortona Dr." at -1039.47,-2543.29 h90
  text "Global Telescope Network" at -3089.47,-2669.29 h125
  text "Goleta, CA 93117" at -1089.47,-2693.29 h90
  text "www.lcogt.net" at -949.47,-2839.29 h90
  text "DATE" at -3424.47,-2950.09 h32
  text "DESIGNED" at -2484.47,-2950.09 h32
  text "DRAWN" at -1404.47,-2950.09 h32
  text "SCALE" at -324.47,-2950.09 h32
  text "Rich Lobdill" at -1099.47,-3049.29 h55
  text "Rich Lobdill" at -2224.47,-3054.29 h55
  text "1 : 1" at -39.47,-3068.29 h90
  text "2/29/2012" at -3394.47,-3075.29 h90
  text "CHECKED/DATE" at -3424.47,-3240.09 h32
  text "APPROVED/DATE" at -1404.47,-3240.09 h32
  text "TITLE" at -3424.47,-3530.09 h32
  text "Layer Stack Up Detail for: 175-00035 rev2, Flex Pwr Sply.PcbDoc" at -16554.17,-3583.29 h76
  text "175-00035, FLEX POWER SUPPLY" at -3204.47,-3674.29 h100
  text "SIZE" at -3424.47,-3860.09 h32
  text "DOC NO." at -2964.47,-3860.09 h32
  text "REV" at -884.47,-3860.09 h32
  text "SHEET" at -424.47,-3860.09 h32
  text "Layer" at -16554.17,-3957.63 h76
  text "OF" at 5.53,-3963.29 h60
  text "1" at -164.47,-3983.29 h100
  text "X" at 235.53,-3983.29 h100
  text "2" at -739.47,-3996.29 h130
  text "-" at -2409.47,-3998.29 h130
  text "GPT" at -1689.75,-4013.09 h130
  text "C" at -3289.47,-4014.29 h100
  text "COPPER THICKNESS" at -13937.01,-4055.12 h100
  text "Name" at -16554.17,-4109.63 h76
  text "Top Layer (*GTL)" at -16554.17,-4389.45 h106
  text "3 oz" at -13399.29,-4409.84 h100
  text "3 oz" at -13399.29,-4803.54 h100
  text "Internal Plane 1 (*GP1)" at -16554.17,-4821.89 h106
  text "3 oz" at -13438.66,-5236.61 h100
  text "Internal Plane 2 (*GP2)" at -16554.17,-5254.33 h106
  text "NOTE: COPPER THICKNESS: 3 oz ALL LAYERS" at -11141.73,-5590.55 h150
  text "3 oz" at -13438.66,-5669.69 h100
  text "Internal Plane 3 (*.GP3)" at -16554.17,-5686.77 h106
  text "Bottom Layer (*GBL)" at -16554.17,-6119.21 h106
  text "3 oz" at -13438.66,-6142.13 h100
  text "Las Cumbres Observatory, Inc." at 863.05,-6720 h90
  text "Las Cumbres Observatory" at -906.95,-6840 h150
  text "PRIMARY PCB SPECIFICATIONS" at -10069.95,-6855 h200
  text "6740 Cortona Dr." at 1303.05,-6874 h90
  text "Global Telescope Network" at -746.95,-7000 h125
  text "Goleta, CA 93117" at 1253.05,-7024 h90
  text "(REFER TO COMPLETE SPEC LISTING AT LEFT FOR FURTHER DETAILS)" at -10416.95,-7060 h100
  text "www.lcogt.net" at 1393.05,-7170 h90
  text "DATE" at -1081.95,-7280.8 h32
  text "DESIGNED" at -141.95,-7280.8 h32
  text "DRAWN" at 938.05,-7280.8 h32
  text "SCALE" at 2018.05,-7280.8 h32
  text "NUMBER OF LAYERS" at -10316.95,-7310 h150
  text "5" at -6766.95,-7310.02 h150
  text "Rich Lobdill" at 1243.05,-7380 h55
  text "Rich Lobdill" at 118.05,-7385 h55
  text "1 : 1" at 2303.05,-7399 h90
  text "2/29/2012" at -1051.95,-7406 h90
  text "FINISHED THICKNESS" at -10316.95,-7560 h150
  text ".062\"" at -6941.95,-7560 h150
  text "CHECKED/DATE" at -1081.95,-7570.8 h32
  text "APPROVED/DATE" at 938.05,-7570.8 h32
  text "BASE MATERIAL" at -10316.95,-7810 h150
  text "FR4" at -7016.95,-7810 h150
  text "TITLE" at -1081.95,-7860.8 h32
  text "175-00035, FLEX POWER SUPPLY" at -861.95,-8005 h100
  text "GOLD IMMERSION" at -7510.95,-8027 h150
  text "PLATING TYPE" at -10316.95,-8060 h150
  text "THIS DRAWING EMBODIES A PROPRIETARY DESIGN OWNED BY LAS CUMBRES" at -17936.95,-8084 h60
  text "OBSERVATORY.  IT IS SUBMITTED FOR A SPECIFIC PURPOSE UNDER A CON-" at -17936.95,-8184 h60
  text "SIZE" at -1081.95,-8190.8 h32
  text "DOC NO." at -621.95,-8190.8 h32
  text "REV" at 1458.05,-8190.8 h32
  text "SHEET" at 1918.05,-8190.8 h32
  text "FIDENTIAL RELATIONSHIP, AND EXCEPT FOR PURPOSES EXPRESSLY GRANTED" at -17936.95,-8279 h60
  text "OF" at 2348.05,-8294 h60
  text "SOLDER MASK COLOR" at -10316.95,-8310 h150
  text "BLACK" at -6891.95,-8310 h150
  text "1" at 2178.05,-8314 h100
  text "X" at 2578.05,-8314 h100
  text "2" at 1603.05,-8327 h130
  text "-" at -66.95,-8329 h130
  text "GPT" at 652.77,-8343.8 h130
  text "C" at -946.95,-8345 h100
  text "IN WRITING, ALL RIGHTS ARE RESERVED BY LAS CUMBRES OBSERVATORY." at -17936.95,-8369 h60
Mechanical 3:
  lines w5: -1653.54,0 -78.74,0
Mechanical 5:
  text "175-00035 REV 2, FLEX PWR SUPPLY" at -4319.22,-885.42 h80
  text "LAS CUMBRES OBSERVATORY     2/29/2012" at -4319.22,-1035.43 h80
Drill Drawing:
  lines w10: -18046.95,-8445 -18046.95,7555 2953.05,7555 2953.05,-8445 -18046.95,-8445 ; -1101.95,-8339 ccw(c-1051.95,-8339) -1051.95,-8389 -721.95,-8389 ccw(c-721.95,-8349) -681.95,-8349 -681.95,-8179 ccw(c-721.95,-8179) -721.95,-8139 -1101.95,-8139 -1101.95,-8339 ; -1101.95,-8049 ccw(c-1051.95,-8049) -1051.95,-8099 2848.05,-8099 ccw(c2848.05,-8049) 2898.05,-8049 2898.05,-7859 ccw(c2848.05,-7859) 2848.05,-7809 -1101.95,-7809 -1101.95,-8049 ; -1101.95,-7729 ccw(c-1061.95,-7729) -1061.95,-7769 358.05,-7769 ccw(c358.05,-7719) 408.05,-7719 408.05,-7569 ccw(c358.05,-7569) 358.05,-7519 -1101.95,-7519 -1101.95,-7729 ; -641.95,-8349 ccw(c-601.95,-8349) -601.95,-8389 1358.05,-8389 ccw(c1358.05,-8349) 1398.05,-8349 1398.05,-8179 ccw(c1358.05,-8179) 1358.05,-8139 -641.95,-8139 -641.95,-8349 ; 448.05,-7719 ccw(c498.05,-7719) 498.05,-7769 1908.05,-7769 ccw(c1908.05,-7719) 1958.05,-7719 1958.05,-7569 ccw(c1908.05,-7569) 1908.05,-7519 448.05,-7519 448.05,-7719 ; 1438.05,-8339 ccw(c1488.05,-8339) 1488.05,-8389 1818.05,-8389 ccw(c1818.05,-8349) 1858.05,-8349 1858.05,-8179 ccw(c1818.05,-8179) 1818.05,-8139 1438.05,-8139 1438.05,-8339 ; 1898.05,-8349 ccw(c1938.05,-8349) 1938.05,-8389 2848.05,-8389 ccw(c2848.05,-8339) 2898.05,-8339 2898.05,-8189 ccw(c2848.05,-8189) 2848.05,-8139 1898.05,-8139 1898.05,-8349 ; 1998.05,-7719 ccw(c2048.05,-7719) 2048.05,-7769 2848.05,-7769 ccw(c2848.05,-7719) 2898.05,-7719 2898.05,-7569 ccw(c2848.05,-7569) 2848.05,-7519 1998.05,-7519 1998.05,-7719
  lines w20: -18021.89,-7814.12 cw(c-17971.95,-7889) -17971.95,-7799 ; -17971.95,-7839 ccw(c-17971.95,-7889) -18021.95,-7889 -18021.95,-8379 ccw(c-17971.95,-8379) -17971.95,-8429 -14771.95,-8429 ccw(c-14771.95,-8379) -14721.95,-8379 -14721.95,-8039 ccw(c-14771.95,-8039) -14771.95,-7989 -17411.95,-7989 ; -14697.08,-8428.94 ccw(c-14771.95,-8379) -14681.95,-8379 -14681.95,-8039 ; -1147.03,-8427.66 cw(c-1051.95,-8339) -1181.95,-8339 -1181.95,-7519 cw(c-1101.95,-7519) -1101.95,-7439 2848.05,-7439 cw(c2848.05,-7569) 2936.71,-7473.92 ; -1141.95,-8339 ccw(c-1051.95,-8339) -1051.95,-8429 2848.05,-8429 ccw(c2848.05,-8339) 2938.05,-8339 2938.05,-7569 ccw(c2848.05,-7569) 2848.05,-7479 -1101.95,-7479 ccw(c-1101.95,-7519) -1141.95,-7519 -1141.95,-8339
  lines w30: -18546.95,-8945 -18546.95,8055 3453.05,8055 3453.05,-8945 -18546.95,-8945
  text ".Legend" at -7572.95,-4328 h100
  text "DESIGNED" at -1081.95,-7570.8 h32
  text "DRAWN" at 468.05,-7570.8 h32
  text "SCALE" at 2018.05,-7570.8 h32
  text "Rich Lobdill" at -595.95,-7667 h55
  text "Rich Lobdill" at 965.05,-7669 h55
  text "1 : 1" at 2303.05,-7689 h90
  text "TITLE" at -1081.95,-7860.8 h32
  text "175-00035, FLEX POWER SUPPLY" at -864.95,-8005 h100
  text "THIS DRAWING EMBODIES A PROPRIETARY DESIGN OWNED BY LAS CUMBRES" at -17931.95,-8099 h60
  text "SIZE" at -1081.95,-8190.8 h32
  text "DOC NO." at -621.95,-8190.8 h32
  text "REV" at 1458.05,-8190.8 h32
  text "SHEET" at 1918.05,-8190.8 h32
  text "OBSERVATORY.  IT IS SUBMITTED FOR A SPECIFIC PURPOSE UNDER A CON-" at -17931.95,-8199 h60
  text "FIDENTIAL RELATIONSHIP, AND EXCEPT FOR PURPOSES EXPRESSLY GRANTED" at -17931.95,-8294 h60
  text "OF" at 2348.05,-8294 h60
  text "2" at 2163.05,-8314 h100
  text "X" at 2578.05,-8314 h100
  text "-" at -66.95,-8329 h130
  text "2" at 1598.05,-8329 h130
  text "C" at -946.95,-8345 h120
  text "GD1" at 753.05,-8345 h120
  text "IN WRITING, ALL RIGHTS ARE RESERVED BY LAS CUMBRES OBSERVATORY." at -17931.95,-8384 h60

## Dimensions
-6377.95,0 to -6377.95,3937.01 on Mechanical 2
-6377.95,0 to 0,0 on Mechanical 2
-6377.95,1771.65 to -5000,0 on Mechanical 2
-5000,0 to -6377.95,1771.65 on Mechanical 2
-236.22,3838.58 to -866.14,5354.33 on Mechanical 1
-255.91,354.33 to -866.14,5334.65 on Mechanical 1
-1692.91,3248.03 to -2322.83,4429.13 on Mechanical 1
-2952.76,3267.72 to -3405.51,4429.13 on Mechanical 1
-1692.91,1968.5 to -2677.17,4429.13 on Mechanical 1
-2992.13,2007.87 to -3858.27,4429.13 on Mechanical 1

## Text inside footprints (layer, text, board x,y; h text height)
P1: Top Overlay "1" at -390.24,1853.5 h40; Top Overlay "PCB EDGE" at -160.24,1718.5 h50 r90; Top Overlay "13" at -895.24,1378.5 h40; Top Overlay "16" at -895.24,2523.5 h40; Top Overlay "4" at -865.24,1848.5 h40; Top Overlay "12" at -885.24,2043.5 h40; Top Overlay "14" at -905.24,1628.5 h40; Top Overlay "15" at -890.24,2273.5 h40
PS1: Top Overlay "1" at -1492.95,3620.13 h70